# Altium PCB PCB1.PcbDoc
Units mil, origin at the board's own origin, x right, y up, seen from the top; angles counter-clockwise.
Board outline 4620 x 4365 mil, 2 copper layers (Top Layer, Bottom Layer); 103 components, 89 nets, 461 pads, 49 vias.
Unrouted connection lines stored in the file: 40.
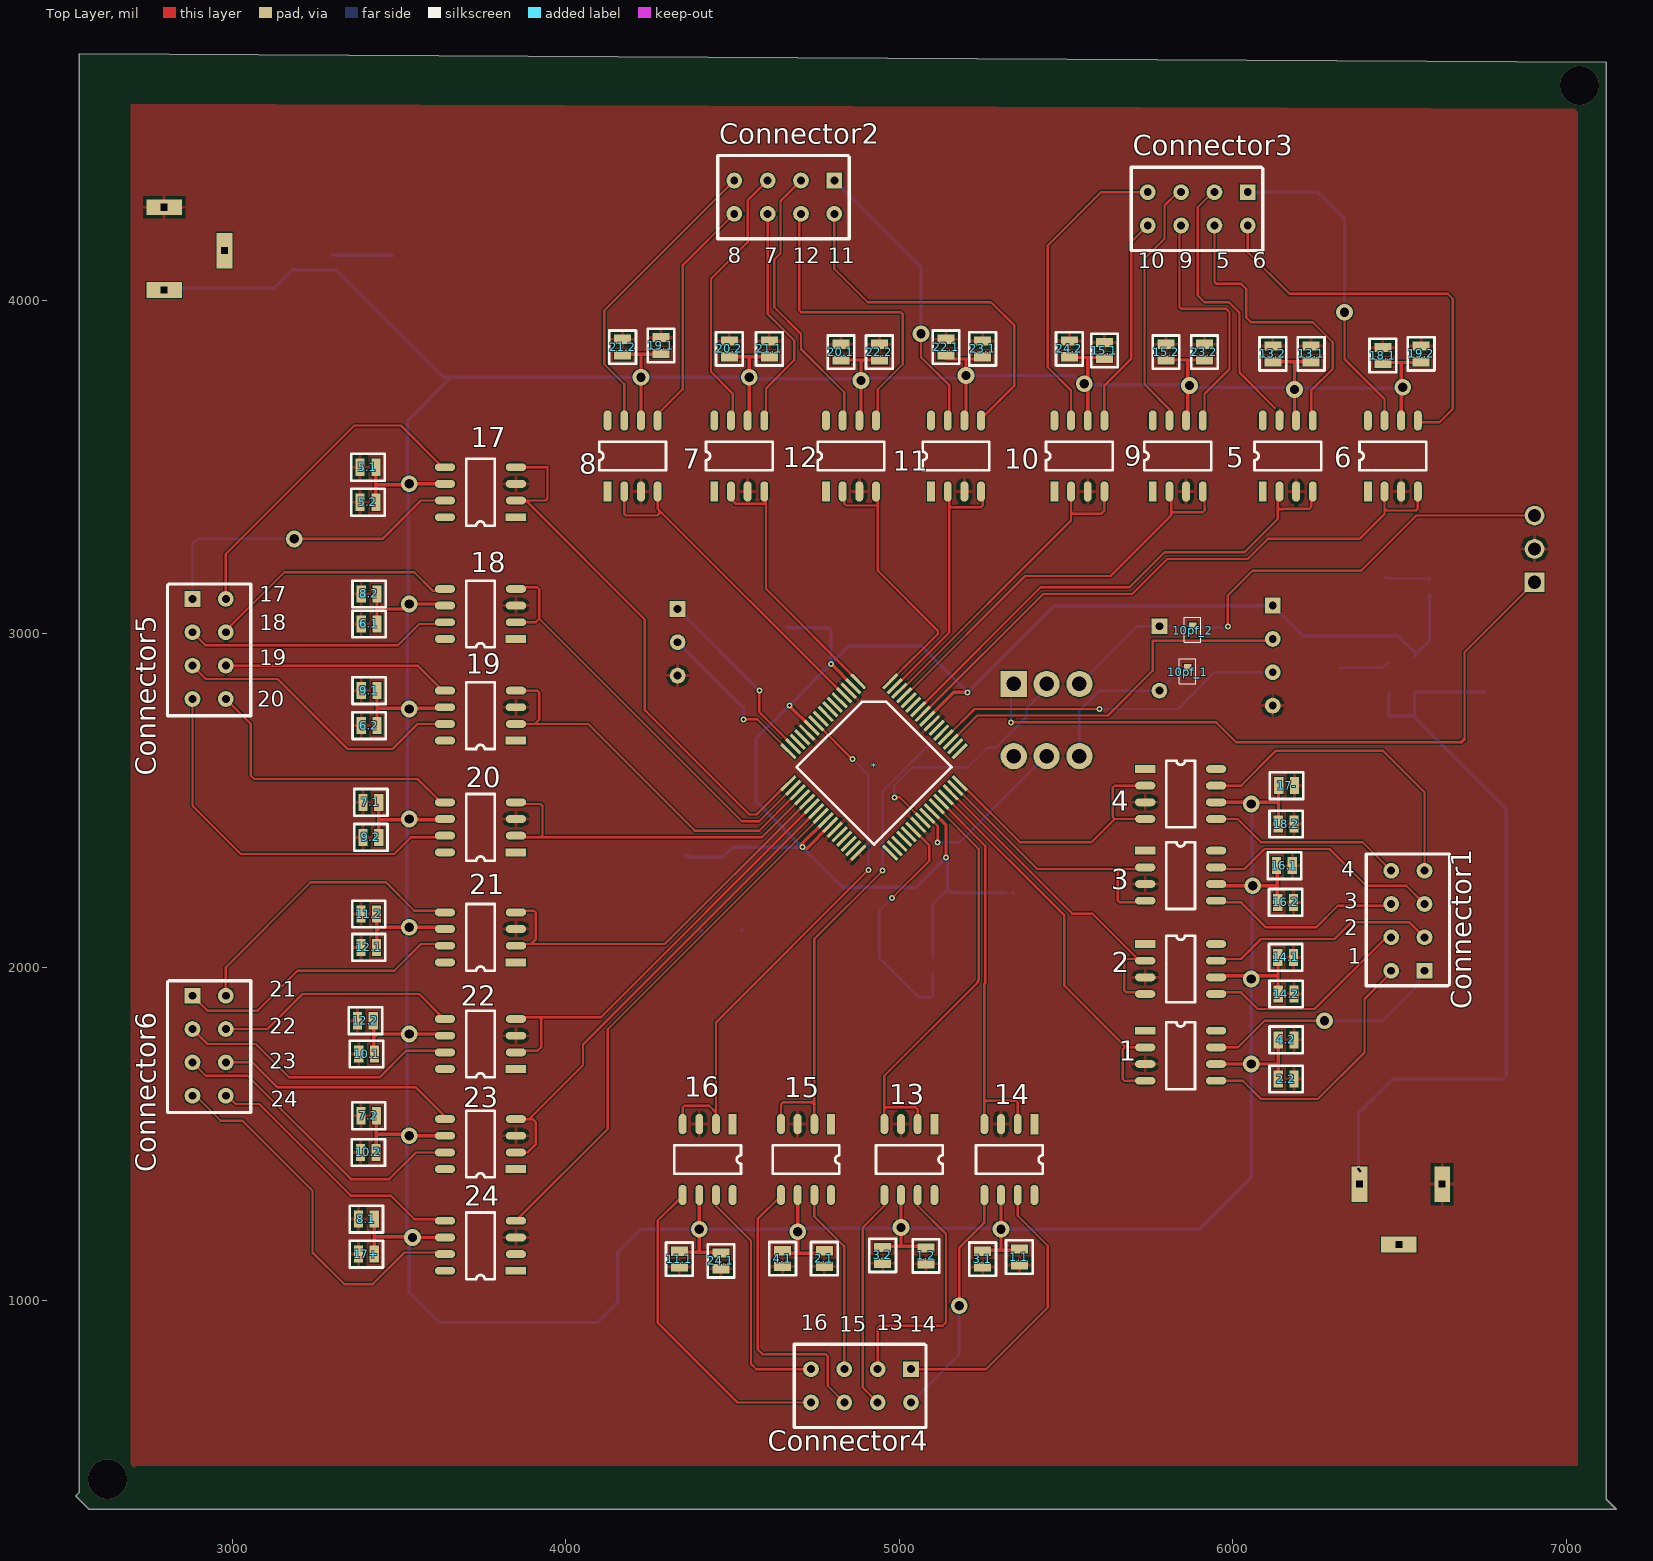
[diagram p0: Top Layer view]
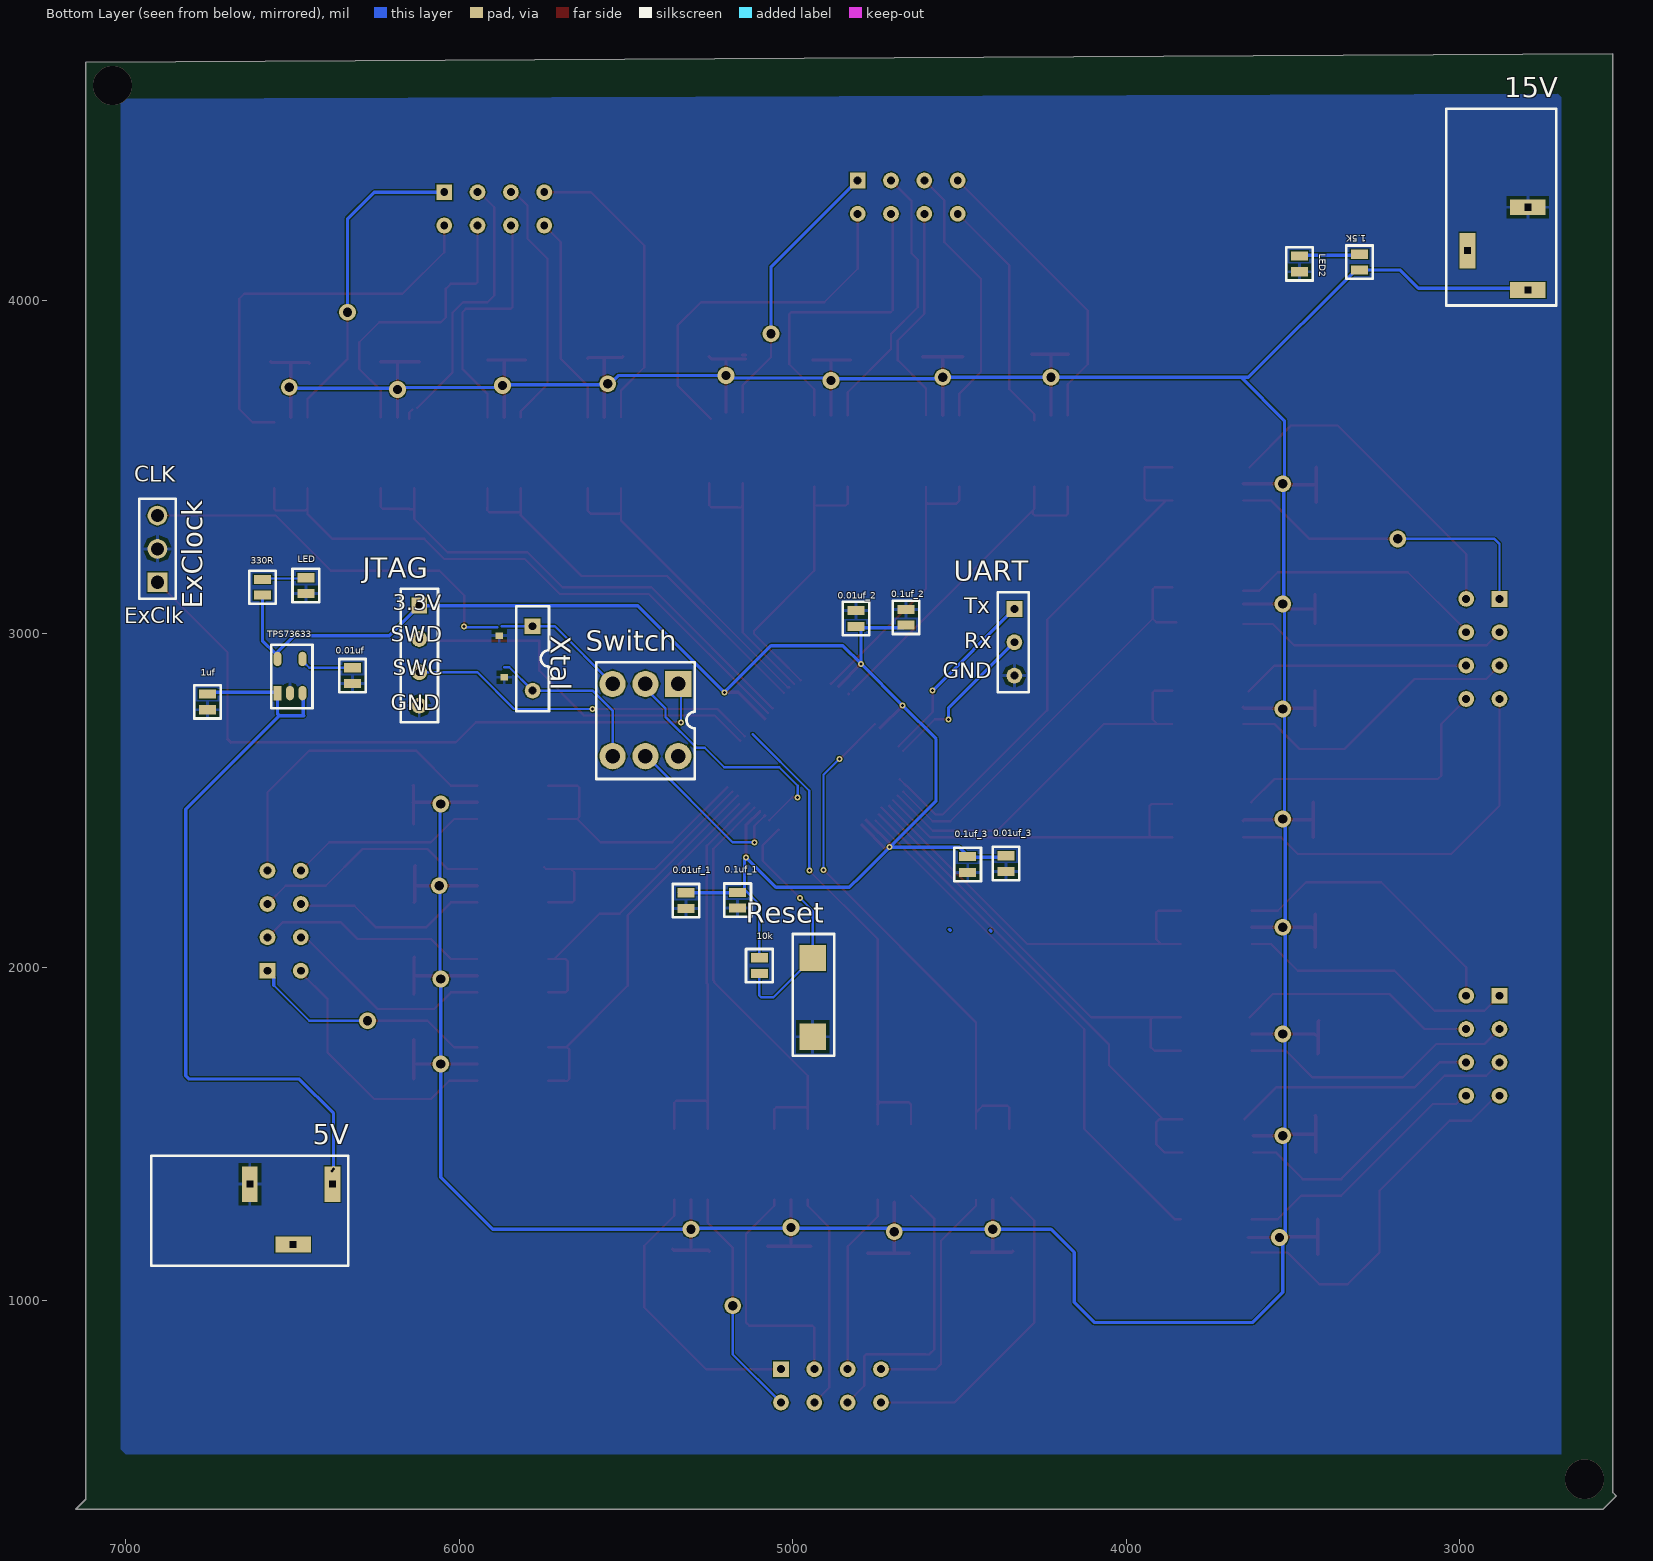
[diagram p1: Bottom Layer view, seen from below]

## Layer stack, top to bottom
Top Solder: solder mask 0.4, Solder Resist, Dk 3.5
Top Layer: signal copper 1.4
Dielectric 1: dielectric 12.6, FR-4, Dk 4.8
Bottom Layer: signal copper 1.4
Bottom Solder: solder mask 0.4, Solder Resist, Dk 3.5

## Board outline
2540,4740 2540,425 2530,415 2570,375 7150,375 7120,405 7120,4715

## Design rules (kind name [scope] priority, off if disabled: settings)
Clearance [All] p1: gap=2 ignorepadtopadclearanceinfootprint=FALSE except(0: Arc-Hole Track-Hole SMDPad-Hole THPad-Hole Via-Hole Fill-Hole Poly-Hole Region-Hole Text-Hole; 3: Arc-Poly Track-Poly SMDPad-Poly THPad-Poly Via-Poly Fill-Poly Poly-Poly)
ComponentClearance [All] p1 off: gap=10 collisioncheckmode=3 verticalgap=10 showdistances=FALSE
PolygonConnect [All] p1: connectstyle=Relief reliefconductorwidth=10 reliefentries=4 polygonreliefangle="90 Angle" airgapwidth=10
RoomDefinition "Final Design" [InComponentClass('Final Design')] p1: confinementstyle=ConfineIn formatcopy=TRUE lockcomponents=FALSE outline 0,0 2000,0 2000,1000 0,1000
RoutingVias [All] p1: holewidth=28 width=50 viastyle="Through Hole" minholewidth=28 minwidth=50 maxholewidth=28 maxwidth=50
ShortCircuit [All] p1 off: allowed=FALSE
SolderMaskExpansion [All] p1: expansion=4
Width [All] p1 off: maxlimit=10 minlimit=5 preferedwidth=10 bottomlayer_minwidth=10 minimp=50.000000 maximp=50.000000 favimp=50.000000
28 further rules are at their usual default settings.

## Components (designator, comment, footprint, x,y, rotation, side; value= is the part's Value field where it differs from the comment)
0.01uf "Capacitor" 0805 6320,2875 r270 bottom
0.1uf_1 "Capacitor" 0805 5165,2201.38 r270 bottom
0.01uf_1 "Capacitor" 0805 5320,2200 r270 bottom
0.1uf_2 "Capacitor" 0805 4660,3050 r90 bottom
0.01uf_2 "Capacitor" 0805 4810,3046.38 r90 bottom
0.1uf_3 "Capacitor" 0805 4475,2308.62 r270 bottom
0.01uf_3 "Capacitor" 0805 4360,2311.38 r270 bottom
1 "TC4428" TC4428SOC 5737.4,1810 r0 top
1.1 "Capacitor" 0805 5360,1131.38 r270 top
1.2 "Capacitor" 0805 5080,1135 r270 top
1.5K "Resistor" 0805 3300,4115 r270 bottom
1uf "Capacitor" 0805 6755,2796.38 r90 bottom
2 "TC4428" TC4428SOC 5737.4,2070 r0 top
2.1 "Capacitor" 0805 4775,1126.38 r270 top
2.2 "Capacitor" 0805 6160,1665 r0 top
3 "TC4428" TC4428SOC 5737.4,2350 r0 top
3.1 "Capacitor" 0805 5250,1125 r270 top
3.2 "Capacitor" 0805 4950,1136.38 r270 top
4 "TC4428" TC4428SOC 5737.4,2595 r0 top
4.1 "Capacitor" 0805 4650,1126.38 r270 top
4.2 "Capacitor" 0805 6160,1782.76 r0 top
5 "TC4428" TC4428SOC 6090,3427.4 r90 top
5.1 "Capacitor" 0805 3406.38,3500 r180 top
5.2 "Capacitor" 0805 3406.38,3395 r180 top
5V "3.3VPower" DIP10 6923.31,1350 r180 bottom
6 "TC4428" TC4428SOC 6405,3427.4 r90 top
6.1 "Capacitor" 0805 3410,3030 r180 top
6.2 "Capacitor" 0805 3410,2725 r180 top
7 "TC4428" TC4428SOC 4445,3427.4 r90 top
7.1 "Capacitor" 0805 3415,2495 r180 top
7.2 "Capacitor" 0805 3408.62,1555 r180 top
8 "TC4428" TC4428SOC 4125,3427.4 r90 top
8.1 "Capacitor" 0805 3401.38,1245 r180 top
8.2 "Capacitor" 0805 3410,3120 r180 top
9 "TC4428" TC4428SOC 5760,3427.4 r90 top
9.1 "Capacitor" 0805 3410,2830 r180 top
9.2 "Capacitor" 0805 3415,2390 r180 top
10 "TC4428" TC4428SOC 5465,3427.4 r90 top
10.1 "Capacitor" 0805 3402.24,1740 r180 top
10.2 "Capacitor" 0805 3407.24,1445 r180 top
10k "Resistor" 0805 5100,2005 r90 bottom
10pf_1 "10pf" 10pf 5865,2885 r270 top
10pf_2 "10pf" 10pf 5880,3010 r270 top
11 "TC4428" TC4428SOC 5095,3427.4 r90 top
11.1 "Capacitor" 0805 4340,1125 r270 top
11.2 "Capacitor" 0805 3408.62,2160 r180 top
12 "TC4428" TC4428SOC 4780,3427.4 r90 top
12.1 "Capacitor" 0805 3408.62,2060 r180 top
12.2 "Capacitor" 0805 3398.62,1840 r180 top
13 "TC4428" TC4428SOC 5105,1530 r270 top
13.1 "Capacitor" 0805 6235,3840 r90 top
13.2 "Capacitor" 0805 6120,3840 r90 top
14 "TC4428" TC4428SOC 5405,1530 r270 top
14.1 "Capacitor" 0805 6158.62,2030 r0 top
14.2 "Capacitor" 0805 6160,1920 r0 top
15 "TC4428" TC4428SOC 4795,1530 r270 top
15.1 "Capacitor" 0805 5615,3850 r90 top
15.2 "Capacitor" 0805 5800,3845 r90 top
15V "12VPower" DIP10 2795,4575 r270 bottom
16 "TC4428" TC4428SOC 4500,1530 r270 top
16.1 "Capacitor" 0805 6155,2305 r0 top
16.2 "Capacitor" 0805 6158.62,2195 r0 top
17 "TC4428" TC4428SOC 3850,3350 r180 top
17+ "Capacitor" 0805 3401.38,1140 r180 top
17- "Capacitor" 0805 6161.38,2545 r0 top
18 "TC4428" TC4428SOC 3850,2985 r180 top
18.1 "Capacitor" 0805 6450,3835 r90 top
18.2 "Capacitor" 0805 6160,2430 r0 top
19 "TC4428" TC4428SOC 3850,2680 r180 top
19.1 "Capacitor" 0805 4285,3865 r90 top
19.2 "Capacitor" 0805 6565,3840 r90 top
20 "TC4428" TC4428SOC 3850,2345 r180 top
20.1 "Capacitor" 0805 4825,3845 r90 top
20.2 "Capacitor" 0805 4490,3855 r90 top
21 "TC4428" TC4428SOC 3850,2015 r180 top
21.1 "Capacitor" 0805 4610,3855 r90 top
21.2 "Capacitor" 0805 4170,3860 r90 top
22 "TC4428" TC4428SOC 3850,1695 r180 top
22.1 "Capacitor" 0805 5140,3860 r90 top
22.2 "Capacitor" 0805 4940,3845 r90 top
23 "TC4428" TC4428SOC 3850,1395 r180 top
23.1 "Capacitor" 0805 5250,3855 r90 top
23.2 "Capacitor" 0805 5915,3845 r90 top
24 "TC4428" TC4428SOC 3850,1090 r180 top
24.1 "Capacitor" 0805 4465,1120 r270 top
24.2 "Capacitor" 0805 5510,3855 r90 top
330R "Resistor" 0805 6590,3140 r90 bottom
* "TM4C123GH6PM" "Quad64 - duplicate" 4876.24,2857.44 r315 top
Connector1 "Connector" Connector 6575,1990 r180 top
Connector2 "Connector" Connector 4805,4360 r270 top
Connector3 "Connector" Connector 6045,4325 r270 top
Connector4 "Connector" Connector 5035,795 r270 top
Connector5 "Connector" Connector 2880,3105 r0 top
Connector6 "Connector" Connector 2880,1915 r0 top
ExClock "3pin" 3pin 6905,3155 r0 bottom
JTAG "JTAG" "JTAG - duplicate" 6120,3085 r180 bottom
LED "LED" 0805 6460,3145 r270 bottom
LED2 "LED" 0805 3480,4110 r270 bottom
Reset "Reset" Reset 4940,1910 r270 bottom
Switch "LockBottom" Lock 5343.15,2850 r270 bottom
TPS73633 "TPS73633" 3.3v 6545,2822.64 r90 bottom
UART "UART" UART 4335,3075 r180 bottom
Xtal "Xtal" Crystal 5780,3022.91 r270 bottom

## Footprints (in the part's own frame and the unit in brackets; to place one, negate y for a bottom-side part, rotate by r counter-clockwise, add the part's x,y. Pads: shape width x height; smd on the part's side, far side on the other; paste and mask are expansions set on the pad)
3.3v [mm]
  rect 1.1x0.6 smd: 1(0,0)
  oval 1.1x0.6 smd: 2(0,-0.95) 3(0,-1.9) 4(2.6,-1.9) 6(2.6,0)
  silkscreen extent -1.14,-2.67 3.68,0.48
3pin [mm]
  rect 1.5x1.5 hole 1: 1(0,0)
  round 1.5 hole 1: 2(0,-2.54) 3(0,-5.08)
  silkscreen extent -1.4,-6.35 1.4,1.27
10pf [mm]
  rect 0.5x0.6 smd: 1(-0.381,0)
  rect 0.5x0.6 smd far side: 2(0.381,0)
  silkscreen extent -1.02,-0.64 0.89,0.62
0805 [mm]
  rect 0.7x1.3 smd: 1(-0.6,0) 2(0.6,0)
  silkscreen extent -1.27,-1.02 1.27,1.02
Connector [mm]
  rect 1.2x1.2 hole 0.6: 1(0,0)
  round 1.2 hole 0.6: 2(0,-2.54) 3(0,-5.08) 4(0,-7.62) 5(2.54,-7.62) 6(2.54,-5.08) 7(2.54,-2.54) 8(2.54,0)
  silkscreen extent -1.91,-8.89 4.45,1.14
Crystal [mm]
  rect 1.2x1.2 hole 0.6: 1(0,0)
  round 1.2 hole 0.6: 2(4.9,0)
  silkscreen extent -1.52,-1.25 6.48,1.25
DIP10 [mm]
  rect 1.2x2.7 hole 0.5 square: 1(7.5,0) 2(13.8,0)
  rect 2.7x1.2 hole 0.5 square: 3(10.8,-4.6)
  silkscreen extent 0,-6.22 14.99,2.16
"JTAG - duplicate" [mm]
  rect 1.2x1.2 hole 0.6: 3.3V(0,0)
  round 1.2 hole 0.6: GND(0,-7.62) SWC(0,-5.08) SWD(0,-2.54)
  silkscreen extent -1.4,-8.89 1.43,1.27
Lock [mm]
  rect 2x2 hole 1.1: 1(0,0)
  round 2 hole 1.1: 2(0,-2.5) 3(0,-5) 4(5.5,-5) 5(5.5,-2.5) 6(5.5,0)
  silkscreen extent -1.65,-6.25 7.24,1.25
"Quad64 - duplicate" [mm]
  oval 1.55x0.25 smd: 1(0,0)
  rect 1.55x0.25 smd: 2(0,-0.5) 3(0,-1) 4(0,-1.5) 5(0,-2) 6(0,-2.5) 7(0,-3) 8(0,-3.5) 9(0,-4) 10(0,-4.5) 11(0,-5) 12(0,-5.5) 13(0,-6) 14(0,-6.5) 15(0,-7) 16(0,-7.5) 33(10.96,-7.5) 34(10.96,-7) 35(10.96,-6.5) 36(10.96,-6) 37(10.96,-5.5) 38(10.96,-5) 39(10.96,-4.5) 40(10.96,-4) 41(10.96,-3.5) 42(10.96,-3) 43(10.96,-2.5) 44(10.96,-2) 45(10.96,-1.5) 46(10.96,-1) 47(10.96,-0.5) 48(10.96,0)
  rect 0.25x1.55 smd: 17(1.73,-9.23) 18(2.23,-9.23) 19(2.73,-9.23) 20(3.23,-9.23) 21(3.73,-9.23) 22(4.23,-9.23) 23(4.73,-9.23) 24(5.23,-9.23) 25(5.73,-9.23) 26(6.23,-9.23) 27(6.73,-9.23) 28(7.23,-9.23) 29(7.73,-9.23) 30(8.23,-9.23) 31(8.73,-9.23) 32(9.23,-9.23) 49(9.23,1.73) 50(8.73,1.73) 51(8.23,1.73) 52(7.73,1.73) 53(7.23,1.73) 54(6.73,1.73) 55(6.23,1.73) 56(5.73,1.73) 57(5.23,1.73) 58(4.73,1.73) 59(4.23,1.73) 60(3.73,1.73) 61(3.23,1.73) 62(2.73,1.73) 63(2.23,1.73) 64(1.73,1.73)
  silkscreen extent 1.31,-7.92 9.65,0.42
Reset [mm]
  rect 2x2 smd: 1(-3,0) 2(3,0)
  silkscreen extent -4.83,-1.52 4.44,1.65
TC4428SOC [mm]
  rect 1.55x0.6 smd: 1(0,0)
  oval 1.55x0.6 smd: 2(0,-1.27) 3(0,-2.54) 4(0,-3.81) 5(5.4,-3.81) 6(5.4,-2.54) 7(5.4,-1.27) 8(5.4,0)
  silkscreen extent 1.61,-4.44 3.79,0.64
UART [mm]
  round 1.2 hole 0.6: GND(0,-5.08) Tx(0,-2.54)
  rect 1.2x1.2 hole 0.6: Rx(0,0)
  silkscreen extent -1.27,-6.35 1.11,1.27

## Part data
1 2 3 4 5 6 7 8 9 10 11 12 13 14 15 16 17 18 19 20 21 22 23 24: "Dual High-Speed Power MOSFET Drivers"
*: "IC MCU 32BIT 256KB FLASH 64LQFP"

## Via types
v1: diameter 50, hole 28, Top Layer to Bottom Layer, 29 vias
v2: diameter 18, hole 9, Top Layer to Bottom Layer, 18 vias
v3: diameter 118.11, hole 118.11, Top Layer to Bottom Layer, 2 vias

## Nets (pads, with @x,y where several pads share a name; then routed paths per layer and width w, separated by ;. In a path a pad name is that pad's centre, name@x,y a point inside that pad or via, vN(x,y) a via of type N, cw(c..) or ccw(c..) an arc to the next point about the centre after c; other vN are vias at no path point)
1: 1.2 1.4 *.45 | length 1167.2
  Top Layer w7: *.45@5160.14,2490.14 5495,2155.27 5495,1945 5680,1760 ; 1.4@5733.7,1660 5685,1660 5684.14,1659.14 5675.86,1659.14 5670,1665 5670,1754.14 5675.86,1760 5680,1760 ; 1.2@5733.7,1760 5680,1760
1+: 1.7 Connector1.1 | length 765
  Top Layer w7: 1.7@5946.3,1760 6015,1760 6095,1840 v1(6275,1840) ; Connector1.1@6556.38,1971.38 Connector1.1
  Bottom Layer w7: v1(6275,1840) 6450,1840 6556.38,1946.38
  Bottom Layer w10: 6556.38,1946.38 6556.38,1971.38 Connector1.1
1-: 1.5 Connector1.8 | length 807.6
  Top Layer w7: 1.5@5946.3,1660 6030,1660 6085,1605 6255,1605 6395,1745 6395,1905 6475,1985 Connector1.8
2: 2.2 2.4 *.46 | length 963.5
  Top Layer w7: *.46@5165,2515 5518.7,2161.3 5578.7,2161.3 2.2@5715,2025 ; 2.4@5733.7,1925 5680.86,1925 5675,1930.86 5675,2019.14 5680.86,2025 2.2@5715,2025 ; 2.2@5733.7,2025 2.2@5715,2025
2+: 2.7 Connector1.2 | length 692.9
  Top Layer w7: 2.7@5946.3,2025 6025,2025 6085,2085 6305,2085 6355,2135 6530,2135 Connector1.2
2-: 2.5 Connector1.7 | length 638.5
  Top Layer w7: 2.5@5946.3,1925 6025,1925 6075,1875 6245,1875 6460,2090 Connector1.7
3: 3.2 3.4 *.47 | length 840.8
  Top Layer w7: *.47@5181.64,2526.64 5413.28,2295 5665,2295 ; 3.4@5733.7,2195 5660.86,2195 5655,2200.86 5655,2285 5665,2295 ; 3.2@5745,2300 5740,2295 5733.7,2295 5665,2295
3+: 3.7 Connector1.3 | length 721.9
  Top Layer w7: 3.7@5946.3,2295 6035,2295 6095,2355 6290,2355 6400,2245 6520,2245 Connector1.3
3-: 3.5 Connector1.6 | length 588.8
  Top Layer w7: 3.5@5946.3,2195 6025,2195 6100,2120 6250,2120 6315,2185 6470,2185 Connector1.6
3.3V: 0.1uf_1.1 0.01uf_1.1 0.01uf_2.1 0.1uf_2.1 0.01uf_3.1 0.1uf_3.1 10k.2 330R.1 *.2 *.11 *.25 *.26 *.42 *.56 JTAG.3.3V TPS73633.6 | length 5249.5
  Top Layer w10: v2(4670,2785) 4670.29,2785 *.11 ; *.25 4705,2367.16 4705,2365 4713.7,2356.3 4721.98,2356.3 *.26 ; v2(4795,2910) 4795.84,2910 *.2 ; *.56 5162.84,2825 v2(5205,2825) ; *.42 5140,2426.64 v2(5140,2330)
  Bottom Layer w7: 10k.2 5100,2189.37 0.1uf_1.1@5144.41,2233.78
  Bottom Layer w10: 0.01uf_3.1 0.01uf_3.1@4371.81,2335 ; 0.01uf_3.1@4370,2330 4470,2330 4500.65,2360.65 v2(4709.35,2360.65) ; 0.1uf_2.1@4665,3021.38 4667.5,3018.88 4787.5,3018.88 4795,3011.38 v2(4795,2910) ; 0.01uf_1.1 5319.31,2224.31 5165.69,2224.31 0.1uf_1.1 5153.19,2225 5144.41,2233.78 5144.41,2323.43 5140,2327.84 v2(5140,2330) 5050,2240 4830,2240 4795,2275 v2(4709.35,2360.65) ; TPS73633.6@6545,2934.84 TPS73633.6@6550.08,2939.92 ; 330R.1 6590,2979.84 TPS73633.6@6550.08,2939.92 ; v2(4709.35,2360.65) 4570,2500 4570,2685 v2(4670,2785) v2(4795,2910) ; v2(4795,2910) 4850,2965 5065,2965 v2(5205,2825) 5465,3085 JTAG.3.3V 6210,2995 6495,2995 TPS73633.6@6550.08,2939.92
4: 4.2 4.4 *.48 | length 828.3
  Top Layer w7: *.48@5195.78,2540.78 5361.57,2375 5575.86,2375 5645.86,2445 ; 4.4@5733.7,2445 5645.86,2445 ; 4.2@5733.7,2545 5645.86,2545 5640,2539.14 5640,2450.86 5645.86,2445
4+: 4.7 Connector1.4 | length 959
  Top Layer w7: 4.7@5946.3,2545 6025,2545 6130,2650 6450,2650 6575,2525 Connector1.4
4-: 4.5 Connector1.5 | length 592.9
  Top Layer w7: 4.5@5946.3,2445 6015,2445 6085,2375 6390,2375 Connector1.5
5: 5.2 5.4 *.58 | length 1564.5
  Top Layer w7: *.58@5060.02,2776.78 5423.24,3140 5690,3140 5795,3245 6035,3245 6135,3345 6135,3380 ; 5.2@6135,3437.4 6135,3380 ; 5.4@6235,3437.4 6235,3380.86 6229.14,3375 6150,3375 6149.14,3374.14 6140.86,3374.14 6135,3380
5+: 5.7 Connector3.2 | length 841
  Top Layer w7: Connector3.2 5940,4325 5895,4280 5895,4015 5915,3995 5988.28,3995 6020,3963.28 6020,3783.7 6125.47,3678.23 ; 6140.47,3673.23 6150,3663.7 5.7@6150,3645
5-: 5.5 Connector3.7 | length 900.8
  Top Layer w7: Connector3.7 5945,4055.86 5950.86,4050 6025,4050 6040,4035 6040,3950 6055,3935 6240,3935 6300,3875 6300,3795 6235,3730 5.5@6235,3650
5V: 1uf.2 5V.2 TPS73633.1 TPS73633.3 | length 2283.3
  Bottom Layer w10: v2(6381.97,1390) v2(6376.97,1395) 6376.97,1561.97 6480,1665 6810,1665 6820,1675 6820,2474.14 6539.14,2755 ; 6465.86,2755 6467.59,2755 ; TPS73633.3 6467.59,2820.03 6467.59,2755 ; 1uf.2@6755,2825 6547.36,2825 TPS73633.1 6545,2760.86 6539.14,2755 ; 6467.59,2755 6539.14,2755
6: 6.2 6.4 *.57 | length 1872.1
  Top Layer w7: *.57@5074.16,2762.63 5431.53,3120 5698.28,3120 5803.28,3225 6045,3225 6105,3285 6380,3285 6455,3360 6455,3375.86 ; 6.2@6455,3437.4 6455,3375.86 ; 6.4@6555,3437.4 6555,3375.86 6549.14,3370 6460.86,3370 6455,3375.86
6+: 6.7 Connector3.1 | length 967.8
  Top Layer w7: v1(6335,3965) 6335,3825 6455,3705 6.7@6455,3650
  Bottom Layer w10: Connector3.1 6255,4325 6335,4245 v1(6335,3965)
6-: 6.5 Connector3.8 | length 1204.6
  Top Layer w7: Connector3.8 6045,4145 6170,4020 6645,4020 6660,4005 6660,3675 6620,3635 6.5@6555,3635
7: 7.2 7.4 *.1 | length 859.3
  Top Layer w7: 7.2@4500,3442.4 4500,3400 4510,3390 4594.14,3390 4600,3395.86 ; 7.4@4600,3442.4 4600,3395.86 ; *.1@4885.26,2850.26 4600,3135.52 4600,3395.86
7+: 7.7 Connector2.3 | length 802.3
  Top Layer w7: 7.7@4500,3655 4500,3721.19 4435,3786.19 4435,4065 4545,4175 4545,4300 Connector2.3
7-: 7.5 Connector2.6 | length 673.3
  Top Layer w7: 7.5@4600,3655 4600,3736.19 4685,3821.19 4685,3880 4605,3960 Connector2.6
8: 8.2 8.4 *.4 | length 1041.1
  Top Layer w7: 8.2@4175,3442.4 4175,3360 4180,3355 4274.14,3355 4280,3360.86 4280,3370.27 ; 8.4@4275,3442.4 4275,3375.27 4280,3370.27 ; *.4@4820.14,2830.14 4280,3370.27 ; *.4@4831.74,2818.53 *.4@4831.74,2820.26
8+: 8.7 Connector2.4 | length 891.4
  Top Layer w7: 8.7@4175,3655 4175,3748.69 4115,3808.69 4115,3970 Connector2.4
8-: 8.5 Connector2.5 | length 715.3
  Top Layer w7: 8.5 4275,3658.7 4350,3733.7 4350,4105 Connector2.5
9: 9.2 9.4 *.61 | length 1263.7
  Top Layer w7: *.61@5026.42,2823.58 5376.42,3173.58 5633.58,3173.58 5815,3355 5815,3370.86 ; 9.2@5815,3437.4 5815,3370.86 ; 9.4@5915,3437.4 5915,3380 5915.86,3379.14 5915.86,3370.86 5910,3365 5820.86,3365 5815,3370.86
9+: 9.7 Connector3.3 | length 759.6
  Top Layer w7: 9.7@5815,3650 5815,3668.7 5735,3748.7 5735,4125 5795,4185 5795,4285 5835,4325 Connector3.3
9-: 9.5 Connector3.6 | length 748.8
  Top Layer w7: Connector3.6 5840,4220 5840,3980.86 5845.86,3975 5980,3975 5990,3965 5990,3795 5915,3720 9.5@5915,3650
10: 10.2 10.4 *.62 | length 983.2
  Top Layer w7: *.62@5010,2840 5014.55,2840 5515,3340.45 5515,3365.86 ; 10.2@5515,3437.4 5515,3365.86 ; 10.4@5615,3437.4 5615,3370 5605,3360 5520.86,3360 5515,3365.86
10+: 10.7 Connector3.4 | length 910.3
  Top Layer w7: 10.7@5515,3650 5515,3730 5445,3800 5445,4165 5605,4325 Connector3.4
10-: 10.5 Connector3.5 | length 628.8
  Top Layer w7: 10.5@5615,3650 5615,3745 5695,3825 5695,4175 Connector3.5
11: 11.2 11.4 *.63 | length 838.4
  Top Layer w7: *.63@4995,2850 5150,3005 5150,3385 ; 11.2@5150,3452.4 5150,3385 ; 11.4@5250,3452.4 5250,3385.86 5244.14,3380 5165,3380 5164.14,3379.14 5155.86,3379.14 5150,3385
11+: 11.7 Connector2.1 | length 837.9
  Top Layer w7: v1(5065,3900) 5065,3830 5150,3745 11.7@5150,3665
  Bottom Layer w10: Connector2.1 5065,4100 v1(5065,3900)
11-: 11.5 Connector2.8 | length 1096.8
  Top Layer w7: Connector2.8 4805,4095 4905,3995 5275,3995 5345,3925 5345,3745 11.5@5245,3645
12: 12.2 12.4 *.64 | length 868.9
  Top Layer w7: 12.2@4835,3442.4 4835,3390.86 4840.86,3385 4934.14,3385 4935,3385.86 ; 12.4@4935,3442.4 4935,3385.86 ; *.64@4975.64,2861.16 5045.49,2931.01 5046.01,2931.01 5115.86,3000.86 5115.86,3009.14 4935,3190 4935,3385.86
12+: 12.7 Connector2.2 | length 825.1
  Top Layer w7: Connector2.2 4643.62,4298.62 4643.62,4141.72 4625,4123.09 4625,3980 4705,3900 4705,3855 4835,3725 12.7@4835,3655
12-: 12.5 Connector2.7 | length 941.3
  Top Layer w7: Connector2.7 4700,4255 4700,3970.86 4705.86,3965 5004.14,3965 5010,3959.14 5010,3808.69 4935,3733.69 12.5@4935,3655
13: 13.2 13.4 *.43 | length 1292.7
  Top Layer w7: 13.4@4955,1516.3 4955,1574.14 ; 13.2@5055,1516.3 5055,1574.14 5049.14,1580 4960.86,1580 4955,1574.14 ; *.43@5115.25,2478.46 5237.71,2356 5237.71,1961.12 5235,1958.41 5235,1955 4955,1675 4955,1574.14
13+: 13.7 Connector4.2 | length 739.6
  Top Layer w7: Connector4.2 4935,919.14 4940.86,925 5130,925 5140,935 5140,1200 5055,1285 13.7@5055,1303.7
13-: 13.5 Connector4.7 | length 654.3
  Top Layer w7: Connector4.7 4890,740 4890,1220 4955,1285 13.5@4955,1303.7
14: 14.2 14.4 *.44 | length 1213.3
  Top Layer w7: *.44@5129.39,2492.6 5257.71,2364.28 5257.71,1952.84 5255,1950.13 5255,1594.14 ; 14.4@5255,1516.3 5255,1594.14 ; 14.2@5355,1516.3 5355,1594.14 5349.14,1600 5260.86,1600 5255,1594.14
14+: 14.7 Connector4.1 | length 847.6
  Top Layer w7: Connector4.1 5260,795 5445,980 5445,1165 5355,1255 14.7@5355,1303.7
14-: 14.5 Connector4.8 | length 699.8
  Top Layer w7: v1(5180,985) 5180,1160 5255,1235 14.5@5255,1303.7
  Bottom Layer w7: Connector4.8 5180,840 v1(5180,985)
15: 15.2 15.4 *.53 | length 1489.3
  Top Layer w7: 15.4 4645,1589.14 4650.86,1595 4739.14,1595 ; 15.2 4745,1589.14 4745,2085 v2(4950,2290)
  Top Layer w10: 4739.14,1595 4745,1589.14
  Bottom Layer w7: v2(4950,2290) 4950,2530 5120,2700
15+: 15.7 Connector4.3 | length 546
  Top Layer w7: 15.7@4745,1303.7 4745,1253.16 4835,1163.16 Connector4.3
15-: 15.5 Connector4.6 | length 868.2
  Top Layer w7: 15.5@4645,1315 4575,1245 4575,855 4590.86,839.14 4599.14,839.14 4600,840 4779.14,840 4785,834.14 4785,745 Connector4.6
16: 16.2 16.4 *.10 | length 1640.4
  Top Layer w7: 16.4@4350,1516.3 16.4 4350,1579.14 4355.86,1585 4430,1585 4450,1565 ; 16.2@4450,1516.3 16.2 4450,1565 ; *.10@4754.12,2729.12 4858.24,2625 v2(4860,2625) ; v2(4907.5,2292.5) 4450,1835 4450,1565
  Bottom Layer w7: v2(4860,2625) 4907.5,2577.5 v2(4907.5,2292.5)
16+: 16.7 Connector4.4 | length 722.9
  Top Layer w7: 16.7@4450,1303.7 4450,1285 4555,1180 4555,810.86 4570.86,795 Connector4.4
16-: 16.5 Connector4.5 | length 963.4
  Top Layer w7: 16.5@4345,1310 4275,1240 4275,935 4515,695 Connector4.5
17: 17.2 17.4 *.17 | length 1648.4
  Top Layer w7: 17.2@3861.3,3400 17.2@3880,3400 ; 17.4@3861.3,3500 3944.14,3500 3945,3499.14 3945,3405.86 3939.14,3400 17.2@3880,3400 ; *.17@4658.84,2544.36 4657.45,2544.36 4571.38,2458.28 4550,2458.28 4236.64,2771.64 4236.64,3043.36 17.2@3880,3400 ; *.17@4663.84,2549.36 *.17@4678.84,2564.36
17+: 17.7 Connector5.1 | length 977.5
  Top Layer w7: v1@3195,3285 3450,3285 3565,3400 17.7@3648.7,3400
  Bottom Layer w7: Connector5.1 2880,3270 2895,3285 v1(3185,3285)
17-: 17.5 Connector5.8 | length 996.2
  Top Layer w7: Connector5.8 2980,3240 3365,3625 3505,3625 17.5@3630,3500
18: 18.2 18.4 *.18 | length 1260.4
  Top Layer w7: 18.2 3909.18,3035 3920,3045.82 ; 18.4@3861.3,3140 3914.14,3140 3920,3134.14 3920,3045.82 ; *.18@4668.19,2526.81 4579.66,2438.28 4527.53,2438.28 3920,3045.82
18+: 18.7 Connector5.2 | length 811.1
  Top Layer w7: Connector5.2 2918.62,2966.38 3496.38,2966.38 3560,3030 18.7@3648.7,3030
18-: 18.5 Connector5.7 | length 769
  Top Layer w7: Connector5.7 2980,3010 3155,3185 3545,3185 3600,3130 18.5@3648.7,3130
19: 19.2 19.4 *.19 | length 1160.4
  Top Layer w7: 19.2@3861.3,2730 3906.81,2730 ; 19.4@3861.3,2830 3914.14,2830 3920,2824.14 3920,2743.19 3906.81,2730 ; *.19@4684.83,2515.17 4579.66,2410 4386.84,2410 4066.84,2730 3906.81,2730
19+: 19.7 Connector5.3 | length 903.3
  Top Layer w7: Connector5.3 2920,2865 3135,2865 3345,2655 3480,2655 3555,2730 19.7@3648.7,2730
19-: 19.5 Connector5.6 | length 684.6
  Top Layer w7: Connector5.6 3555,2905 19.5@3632.5,2827.5
20: 20.2 20.4 *.20 | length 1051.4
  Top Layer w7: 20.2@3861.3,2390 3924.14,2390 ; 20.4@3861.3,2490 3924.14,2490 3930,2484.14 3930,2395.86 3924.14,2390 ; *.20@4698.97,2501.03 4587.94,2390 3924.14,2390
20+: 20.7 Connector5.4 | length 1169.5
  Top Layer w7: Connector5.4 2880,2485 3025,2340 3485,2340 3535,2390 20.7@3648.7,2390
20-: 20.5 Connector5.5 | length 864.2
  Top Layer w7: Connector5.5 3055,2730 3055,2575 3065,2565 3555,2565 20.5@3625,2495
21: 21.2 21.4 *.21 | length 1222.4
  Top Layer w7: 21.2@3836.3,2070 3895,2070 ; 21.4@3836.3,2170 3904.14,2170 3910,2164.14 3910,2085 3895,2070 ; *.21@4710.61,2484.39 4296.23,2070 3895,2070
21+: 21.7 Connector6.1 | length 859.3
  Top Layer w7: Connector6.1@2870,1905 Connector6.1 2925,1870 3075,1870 3195,1990 3485,1990 3565,2070 21.7@3623.7,2070
21-: 21.5 Connector6.8 | length 869.5
  Top Layer w7: Connector6.8 2980,2000 3235,2255 3460,2255 3545,2170 21.5@3623.7,2170
22: 22.2 22.4 *.22 | length 1343.9
  Top Layer w7: 22.2@3836.3,1750 3915,1750 3925.86,1760.86 3925.86,1844.14 3920,1850 ; 22.4@3836.3,1850 3920,1850 ; *.22@4733.86,2479.35 4104.51,1850 3920,1850
22+: 22.7 Connector6.2 | length 836.9
  Top Layer w7: Connector6.2 2925,1770 3070,1770 3170,1670 3440.66,1670 3520.66,1750 22.7@3623.7,1750
22-: 22.5 Connector6.7 | length 722.5
  Top Layer w7: Connector6.7 3105,1815 3210,1920 3560,1920 22.5@3630,1850
23: 23.2 23.4 *.23 | length 1499.6
  Top Layer w7: 23.2@3831.3,1445 3885,1445 3910,1470 3910,1535 3900,1545 3892.5,1545 23.4@3831.3,1545 ; 3892.5,1547.5 4051.4,1706.4 4051.4,1768.6 *.23@4741.4,2458.6
23+: 23.7 Connector6.3 | length 916.8
  Top Layer w7: Connector6.3 2920,1675 3045,1675 3355,1365 3470,1365 3550,1445 23.7@3618.7,1445
23-: 23.5 Connector6.6 | length 735.4
  Top Layer w7: Connector6.6 3060,1715 3135,1640 3550,1640 23.5@3645,1545
24: 24.2 24.4 *.24 | length 1584.1
  Top Layer w7: 24.4@3836.3,1245 3855,1245 4125.61,1515.61 4125.61,1814.53 *.24@4750.54,2439.46
24+: 24.7 Connector6.4 | length 1125.5
  Top Layer w7: Connector6.4 2890,1615 2965,1540 3030,1540 3240,1330 3240,1145 3335,1050 3420.66,1050 3515.66,1145 24.7@3623.7,1145
24-: 24.5 Connector6.5 | length 797
  Top Layer w7: Connector6.5 2984.62,1615 3009.62,1590 3080,1590 3355,1315 3475,1315 3545,1245 24.5@3623.7,1245
330R: 330R.2 LED.1 | length 132.1
  Bottom Layer w7: LED.1@6462.5,3166.12 330R.2@6587.5,3166.12
  Bottom Layer w10: LED.1 LED.1@6462.5,3166.12 ; 330R.2@6587.5,3166.12 330R.2
+12: 1.1.1 1.2.1 1.5K.2 1.6 2.1.1 2.2.1 2.6 3.1.1 3.2.1 3.6 4.1.1 4.2.1 4.6 5.1.1 5.2.1 5.6 6.1.1 6.2.1 6.6 7.1.1 7.2.1 7.6 8.1.1 8.2.1 8.6 9.1.1 9.2.1 9.6 10.1.1 10.2.1 10.6 11.1.1 11.2.1 11.6 12.1.1 12.2.1 12.6 13.1.1 13.2.1 13.6 14.1.1 14.2.1 14.6 15.1.1 15.2.1 15.6 15V.2 16.1.1 16.2.1 16.6 17+.1 17-.1 17.6 18.1.1 18.2.1 18.6 19.1.1 19.2.1 19.6 20.1.1 20.2.1 20.6 21.1.1 21.2.1 21.6 22.1.1 22.2.1 22.6 23.1.1 23.2.1 23.6 24.1.1 24.2.1 24.6 | length 17681.6
  Top Layer w10: 12.2.1 3424.06,1838.19 3424.06,1790 ; 17+.1 3425,1192.5 ; 8.1.1 3425,1192.5 ; 10.1.1 3424.06,1741.81 3424.06,1790 ; 5.2.1 3430,3447.5 ; 5.1.1 3430,3447.5 ; 10.2.1 3431.56,1445.69 3431.56,1500 ; 7.2.1 3431.56,1554.31 3431.56,1500 ; 12.1.1 3432.24,2110 ; 11.2.1 3432.24,2110 ; 6.2.1 3433.62,2777.5 ; 9.1.1 3433.62,2777.5 ; 6.1.1 3433.62,3075 ; 8.2.1 3433.62,3075 ; 9.2.1 3438.62,2442.5 ; 7.1.1 3438.62,2442.5 ; v1@3530,1195 3527.5,1192.5 3425,1192.5 ; v1@3530,3080 3525,3075 3433.62,3075 ; v1(3530,3090) 18.6@3648.7,3090 ; v1(3540,1190) 24.6@3633.7,1190 ; 23.6@3618.7,1495 v1(3530,1495) 3525,1500 3431.56,1500 ; 22.6@3623.7,1800 v1(3530,1800) 3434.06,1800 3424.06,1790 ; 21.6@3623.7,2120 v1(3530,2120) 3442.24,2120 3432.24,2110 ; 20.6@3648.7,2440 3646.2,2442.5 3438.62,2442.5 ; 19.6@3648.7,2780 3646.2,2777.5 3433.62,2777.5 ; 17.6@3648.7,3450 17.6 v1(3530,3450) 3527.5,3447.5 3430,3447.5 ; 21.2.1@4172.5,3838.88 4227.5,3838.88 ; 8.6@4225,3655 v1(4225,3770) 4225,3836.38 4227.5,3838.88 ; 19.1.1@4282.5,3838.88 4227.5,3838.88 ; 11.1.1 4342.5,1146.12 4402.5,1146.12 ; 16.6@4400,1303.7 v1(4400,1215) 4400,1148.62 4402.5,1146.12 ; 24.1.1 4462.5,1146.12 4402.5,1146.12 ; 20.2.1 4550,3831.38 ; 7.6@4550,3655 v1(4550,3770) 4550,3831.38 ; 21.1.1 4550,3831.38 ; 4.1.1@4650,1142.4 4695,1142.4 ; 15.6@4695,1296.1 v1(4695,1207.4) 4695,1142.4 ; 2.1.1@4775,1142.4 4695,1142.4 ; 20.1.1 4890,3821.38 ; 12.6@4885,3655 v1(4885,3760) 4885,3816.38 4890,3821.38 ; 22.2.1 4890,3821.38 ; 3.2.1@4945,1163.62 5000,1163.62 ; 13.6@5005,1303.7 v1(5005,1220) 5005,1168.62 5000,1163.62 ; 1.2.1@5075,1163.62 5000,1163.62 ; 22.1.1@5140,3824.38 5243,3824.38 23.1.1 ; 11.6@5200,3665 v1(5200,3775) 5200,3824.14 ; 3.1.1 5253.19,1151.81 5305,1151.81 ; 14.6@5305,1303.7 v1(5305,1215) 5305,1151.81 ; 1.1.1 5356.81,1151.81 5305,1151.81 ; 24.2.1 5512.5,3828.88 5612.5,3828.88 15.1.1 ; 10.6@5565,3650 5565,3826.38 ; 15.2.1 5865,3821.38 ; 9.6@5865,3650 5865,3821.38 ; 23.2.1 5865,3821.38 ; 1.6@5946.3,1710 1.6 v1(6055,1710) 6131.38,1710 6136.38,1715 ; 2.6@5946.3,1975 6135.69,1975 ; 3.6@5946.3,2245 v1(6060,2245) 6128.19,2245 6133.19,2250 ; 4.6@5946.3,2495 4.6 6137.07,2495 ; 13.2.1 6185,3816.38 ; 16.1.1 6133.19,2303.19 6133.19,2250 ; 14.1.1 6135.69,2029.31 6135.69,1975 ; 16.2.1 6133.19,2196.81 6133.19,2250 ; 2.2.1 6136.38,1715 ; 4.2.1 6136.38,1715 ; 14.2.1 6135.69,1920.69 6135.69,1975 ; 18.2.1 6137.07,2430.69 6137.07,2495 ; 6137.76,2495 6137.07,2495 ; 17-.1 6137.07,2544.31 6137.07,2495 ; 5.6@6185,3650 v1(6185,3733.19) 6185,3816.38 ; 13.1.1 6185,3816.38 ; 18.1.1 6452.5,3813.88 6562.5,3813.88 19.2.1 ; 6.6@6505,3650 6505,3811.38
  Bottom Layer w10: 15V.2@2820,4036.97 3123.03,4036.97 3177.44,4091.38 1.5K.2 3311.81,4091.38 3633.19,3770 3655,3770 ; v1@3522.5,1802.5 v1@3522.5,2117.5 ; v1@3522.5,2122.5 v1@3522.5,2442.5 ; v1@3522.8,1197.8 v1@3522.8,1492.2 ; v1@3523.19,1498.19 v1@3523.19,1796.81 ; v1@3525,2445 v1@3525,3080 ; v1@3527.5,3082.5 3527.5,3447.5 v1(3530,3450) 3525,3455 3525,3640 3655,3770 ; v1@3530,1195 3530,1025 3620,935 4095,935 4155,995 4155,1145 4225,1215 v1(4400,1215) 4695,1215 4697.5,1217.5 5002.5,1217.5 v1(5005,1220) 5007.5,1217.5 5302.5,1217.5 v1(5305,1215) 5900,1215 6055,1370 v1(6055,1710) v1(6055,1965) 6057.5,1967.5 6057.5,2242.5 v1(6060,2245) 6057.5,2247.5 6057.5,2487.5 v1(6055,2490) ; v1(6510,3740) 6506.59,3736.59 6188.41,3736.59 v1(6185,3733.19) 6179.09,3739.09 5875.91,3739.09 v1(5870,3745) 5867.5,3747.5 5557.5,3747.5 v1(5555,3750) 5548.43,3750 5523.43,3775 v1(5200,3775) 5192.5,3767.5 4892.5,3767.5 v1(4885,3760) 4880,3765 4555,3765 v1(4550,3770) v1(4225,3770) 3655,3770
  other v1: 3530,2445 3530,2775
Exclock: ExClock.1 Switch.1 | length 2064.4
  Top Layer w7: v2(5335,2735) 5950,2735 6010,2675 6685,2675 ; 6695,2685 6695,2945 ExClock.1
  Top Layer w10: 6685,2675 6695,2685
  Bottom Layer w7: v2(5335,2735) Switch.1@5335,2841.85
  Bottom Layer w10: Switch.1@5335,2841.85 Switch.1
GND: 0.01uf.2 0.01uf_1.2 0.1uf_1.2 0.01uf_2.2 0.1uf_2.2 0.1uf_3.2 0.01uf_3.2 1.1.2 1.2.2 1.3 1uf.1 2.1.2 2.2.2 2.3 3.1.2 3.2.2 3.3 4.1.2 4.2.2 4.3 5.1.2 5.2.2 5.3 5V.1 6.1.2 6.2.2 6.3 7.1.2 7.2.2 7.3 8.1.2 8.2.2 8.3 9.1.2 9.2.2 9.3 10.1.2 10.2.2 10.3 10pf_1.2 10pf_2.2 11.1.2 11.2.2 11.3 12.1.2 12.2.2 12.3 13.1.2 13.2.2 13.3 14.1.2 14.2.2 14.3 15.1.2 15.2.2 15.3 15V.1 16.1.2 16.2.2 16.3 17+.2 17-.2 17.3 18.1.2 18.2.2 18.3 19.1.2 19.2.2 19.3 20.1.2 20.2.2 20.3 21.1.2 21.2.2 21.3 22.1.2 22.2.2 22.3 23.1.2 23.2.2 23.3 24.1.2 24.2.2 24.3 *.3 *.12 *.27 *.32 *.39 *.55 ExClock.2 JTAG.GND LED2.2 LED.2 Reset.2 TPS73633.2 UART.GND | length 11.6
  Top Layer w10: 5140,3836.38 5151.64,3836.38
Net1.5K_-: 1.5K.1 LED2.1 | length 182.1
  Bottom Layer w10: 1.5K.1 3302.5,4136.12 3477.5,4136.12 LED2.1
NR: 0.01uf.1 TPS73633.4 | length 149.7
  Bottom Layer w7: 0.01uf.1 6449.98,2898.62 TPS73633.4@6463.9,2912.55
OSC0: *.40 Switch.2 | length 738.4
  Top Layer w7: v2(4985,2510) 5000.97,2510 *.40
  Bottom Layer w7: v2(4985,2510) 4985,2545 5040,2600 5205,2600 5263.75,2658.75 5288.75,2658.75 5381.25,2751.25 5381.25,2776.25 Switch.2@5440,2835
OSC1: *.41 Switch.5 | length 514.8
  Top Layer w7: *.41@5083.92,2454.78 5115,2423.69 v2(5115,2375)
  Top Layer w10: *.41@5083.92,2454.78 *.41
  Bottom Layer w7: v2(5115,2375) 5180,2375 Switch.5@5432.5,2627.5
Reset: 10k.1 *.38 Reset.1 | length 743.8
  Top Layer w7: v2(4977.5,2207.5) 5090,2320 5090,2365.29 *.38
  Bottom Layer w7: v2(4977.5,2207.5) 4940,2170 Reset.1 5058.11,1910 5094.14,1910 5100,1915.86 10k.1
Rx: *.16 UART.Tx | length 487.7
  Top Layer w7: v2(4532.73,2743.92) 4573.93,2743.92 *.16@4668.33,2649.52
  Bottom Layer w10: UART.Tx 4532.73,2777.27 v2(4532.73,2743.92)
SWC: *.52 JTAG.SWC | length 1055.9
  Top Layer w7: *.52@5143.53,2693.26 5225.27,2775 v2(5600,2775)
  Bottom Layer w7: v2(5600,2775) 5835.57,2775 5945.57,2885 JTAG.SWC
SWD: *.51 JTAG.SWD | length 1139.8
  Top Layer w7: *.51@5157.45,2679.34 5233.61,2755.5 5625.5,2755.5 5760,2890 5760,2980 JTAG.SWD@6120,2980
Tx: *.15 UART.Rx | length 555.4
  Top Layer w7: v2(4580,2830) 4580,2765.69 *.15@4682.25,2663.44
  Bottom Layer w10: UART.Rx v2(4580,2830)
Xtal0: 10pf_2.1 ExClock.3 Switch.3 Xtal.1 | length 1611
  Top Layer w7: v2(5985,3022.91) 5985,3115 6060,3190 6385,3190 6550,3355 ExClock.3
  Bottom Layer w7: Switch.3 5712.91,3022.91 Xtal.1 5872.91,3022.91 ; 5885,3020 v2@5980,3020
Xtal1: 10pf_1.1 Switch.4 Xtal.2 | length 515.4
  Bottom Layer w7: Switch.4 5540,2770 5600,2830 Xtal.2 5850,2900 5865,2900
pads on no net: 1.1 1.8 2.1 2.8 3.1 3.8 4.1 4.8 5.1 5.8 5V.3 6.1 6.8 7.1 7.8 8.1 8.8 9.1 9.8 10.1 10.8 11.1 11.8 12.1 12.8 13.1 13.8 14.1 14.8 15.1 15.8 15V.3 16.1 16.8 17.1 17.8 18.1 18.8 19.1 19.8 20.1 20.8 21.1 21.8 22.1 22.8 23.1 23.8 24.1 24.8 *.5 *.6 *.7 *.8 *.9 *.13 *.14 *.28 *.29 *.30 *.31 *.33 *.34 *.35 *.36 *.37 *.49 *.50 *.54 *.59 *.60 Switch.6
copper on no net: | length 8
  Bottom Layer w10: 4405,2108.62 4407.5,2111.12 ; 4527.5,2111.12 4530,2113.62 ; 5339.31,2224.31 5340,2223.62
  other v3: 2625,465 7040,4645

## Polygon pours and split planes (outlines as drawn)
GND on Top Layer "GND_L01_P020" (solid, remove dead copper, pour order 20): 2695,4590 2695,510 2705,500 2710,505 7035,505 7035,4565 7025,4575
no net on Top Layer "Top Layer-No Net" (solid, pour order 6): 4670,2415
no net on Top Layer "Top Layer-No Net 1" (solid, pour order 4): 6180,-91936.11
no net on Top Layer "Top Layer-No Net 2" (solid, pour order 2): 6385,-91981.11
GND on Bottom Layer "GND_L02_P018" (solid, remove dead copper, pour order 18): 2705,4620 2695,4610 2695,540 7000,540 7015,555 7015,4605

## Silkscreen, mask and mechanical layers (free items; w line width, h text height)
Top Overlay:
  text "8" at 4485,4095.86 h80
  text "7" at 4595,4095 h80
  text "12" at 4680,4095 h80
  text "11" at 4785,4095 h80
  text "10" at 5715,4080 h80
  text "9" at 5840,4080 h80
  text "5" at 5950,4080 h80
  text "6" at 6060,4080 h80
  text "17" at 3080.62,3080 h80
  text "18" at 3080.47,2995 h80
  text "19" at 3080.47,2890 h80
  text "20" at 3075,2765 h80
  text "4" at 6325,2255 h80
  text "3" at 6335,2160 h80
  text "2" at 6335,2080 h80
  text "1" at 6345,1995 h80
  text "21" at 3110,1895 h80
  text "22" at 3110,1785 h80
  text "23" at 3110,1680 h80
  text "24" at 3115,1565 h80
  text "16" at 4705,895 h80
  text "13" at 4930,895 h80
  text "15" at 4820,890 h80
  text "14" at 5030,890 h80
Bottom Overlay:
  text "CLK" at 6975,3440 h80
  text "3.3V" at 6200,3055 h80
  text "Tx" at 4485,3045 h80
  text "ExClk" at 7005,3015 h80
  text "SWD" at 6205,2960 h80
  text "Rx" at 4485,2940 h80
  text "SWC" at 6200,2860 h80
  text "GND" at 4550,2850 h80
  text "GND" at 6205,2755 h80